# EAGLE board office (EAGLE 9.7.0)

Size 172.93 x 109.53 mm. Coordinates in mm from the lower left corner, seen from the top.
Outline: 0,0 172.93,0 172.93,109.53 0,109.53 0,0
Copper layers (1*16): Top 0.035mm / dielectric 1.5mm / Bottom 0.035mm
Design rules "default": minimum track width 6mil, minimum drill 0.35mm, track to track 6mil, track to pad 6mil, pad to pad 6mil, via to via 6mil, smd to smd 6mil, copper to edge 40mil, drill to drill 6mil, minimum pad ring 10mil, minimum via ring 8mil, stop-mask expansion 4mil, vias tented up to drill 0mil, thermal gap 10mil

## Footprints (pad centres in the part's own frame; a part is rotated, then mirrored left to right if it is on the bottom)
LEDRD254W60D565H860B = drill 0.981 pad 1.581: 1 -1.27,0; 2 1.27,0
LEDRD254W60D565H860B_Y = drill 0.981 pad 1.581: 1 -1.27,0; 2 1.27,0
RESAD1016W63L850D250B = drill 0.83 pad 1.43: 1 -5.08,0; 2 5.08,0
SWITCH-MOMENTARY-PTH-6.5MM = drill 1.016 pad 1.88: 1 -3.251,2.261; 2 3.251,2.261; 3 -3.251,-2.261; 4 3.251,-2.261
ARDUINO-UNO-R3-SHIELD = drill 1.016 pad 1.88: 3.3V 24.13,-2.54; 5V 24.13,0; A0 24.13,12.7; A1 24.13,15.24; A2 24.13,17.78; A3 24.13,20.32; A4 24.13,22.86; A5 24.13,25.4; AREF -24.13,-13.97; D2 -24.13,20.32; D3 -24.13,17.78; D4 -24.13,15.24; D5 -24.13,12.7; D6 -24.13,10.16; D7 -24.13,7.62; D8 -24.13,3.81; D9 -24.13,1.27; D10 -24.13,-1.27; D11 -24.13,-3.81; D12 -24.13,-6.35; D13 -24.13,-8.89; GND@0 24.13,2.54; GND@1 24.13,5.08; GND@2 -24.13,-11.43; IOREF 24.13,-7.62; NC 24.13,-10.16; RES 24.13,-5.08; RX -24.13,25.4; SCL -24.13,-19.05; SDA -24.13,-16.51; TX -24.13,22.86; VIN 24.13,7.62

## Placement (x,y rotation side)
D1  RED  [LEDRD254W60D565H860B]  122.15,101.62 180 top
D2  RED  [LEDRD254W60D565H860B]  165.33,101.62 180 top
DLIGHT1  YELLOW  [LEDRD254W60D565H860B_Y]  132.31,101.62 180 top
DLIGHT2  YELLOW  [LEDRD254W60D565H860B_Y]  145.01,101.62 180 top
DLIGHT3  YELLOW  [LEDRD254W60D565H860B_Y]  155.17,101.62 180 top
R1  220  [RESAD1016W63L850D250B]  119.65,8.97 90 top
R2  220  [RESAD1016W63L850D250B]  127.27,8.97 90 top
R3  220  [RESAD1016W63L850D250B]  139.97,8.97 90 top
R4  220  [RESAD1016W63L850D250B]  150.13,8.97 90 top
R5  220  [RESAD1016W63L850D250B]  160.29,8.97 90 top
R6  220  [RESAD1016W63L850D250B]  146.28,86.38 90 top
R7  220  [RESAD1016W63L850D250B]  123.42,86.38 90 top
R8  220  [RESAD1016W63L850D250B]  133.58,86.38 90 top
R9  220  [RESAD1016W63L850D250B]  166.6,86.38 90 top
R10  220  [RESAD1016W63L850D250B]  156.44,86.38 90 top
S1  SWITCH_MOMENTARY  [SWITCH-MOMENTARY-PTH-6.5MM]  132.35,25.48 90 top
S2  SWITCH_MOMENTARY  [SWITCH-MOMENTARY-PTH-6.5MM]  142.51,25.48 90 top
S3  SWITCH_MOMENTARY  [SWITCH-MOMENTARY-PTH-6.5MM]  152.67,25.48 90 top
S4  SWITCH_MOMENTARY  [SWITCH-MOMENTARY-PTH-6.5MM]  122.19,25.48 90 top
S5  SWITCH_MOMENTARY  [SWITCH-MOMENTARY-PTH-6.5MM]  162.83,25.48 90 top
U1  ARDUINO-UNO-R3-SHIELD  [ARDUINO-UNO-R3-SHIELD]  47.88,54.28 270 top

## Library data of the parts
D1 D2 = Tinkercad; CATEGORY: Opto-Electronic; SUB-CATEGORY: LED; VALUE: LED_RED
DLIGHT1-DLIGHT3 = Tinkercad; CATEGORY: Opto-Electronic; SUB-CATEGORY: LED; VALUE: LED_YELLOW
R1-R10 S1-S5 U1 = Tinkercad

## Nets
D1_A: D1.1 R7.2
D2_A: D2.1 R9.2
DLIGHT1_A: DLIGHT1.1 R8.2
DLIGHT2_A: DLIGHT2.1 R6.2
DLIGHT3_A: DLIGHT3.1 R10.2
U1_5V: D1.2 D2.2 DLIGHT1.2 DLIGHT2.2 DLIGHT3.2 S1.3 S1.4 S2.3 S2.4 S3.3 S3.4 S4.3 S4.4 S5.3 S5.4 U1.5V
U1_D2: R1.2 R3.2 R4.2 R5.2 S1.1 S1.2 S2.1 S2.2 S3.1 S3.2 S4.1 S4.2 S5.1 S5.2 U1.D2
U1_D7: R6.1 R7.1 R8.1 R9.1 R10.1 U1.D7
U1_GND: R1.1 R2.1 R3.1 R4.1 R5.1 U1.GND@0 U1.GND@1 U1.GND@2

## Tracks (layer width: path | path; a pad name or v marks a point on that pad's centre or on a via)
D1_A  (1 unrouted)
D2_A  (1 unrouted)
DLIGHT1_A  (1 unrouted)
DLIGHT2_A  (1 unrouted)
DLIGHT3_A  (1 unrouted)
U1_5V  (15 unrouted)
U1_D2  (14 unrouted)
U1_D7  (5 unrouted)
U1_GND  (7 unrouted)